# Altium PCB Fastino_Ground_Isolator.PcbDoc (part 4 of 4)
Units mm, origin at the board's own origin, x right, y up, seen from the top; angles counter-clockwise.
Board outline 40 x 100 mm, 4 copper layers (Top Layer, Layer 1, Layer 2, Bottom Layer), stack 1.551 mm thick; 157 components, 67 nets, 468 pads, 321 vias.
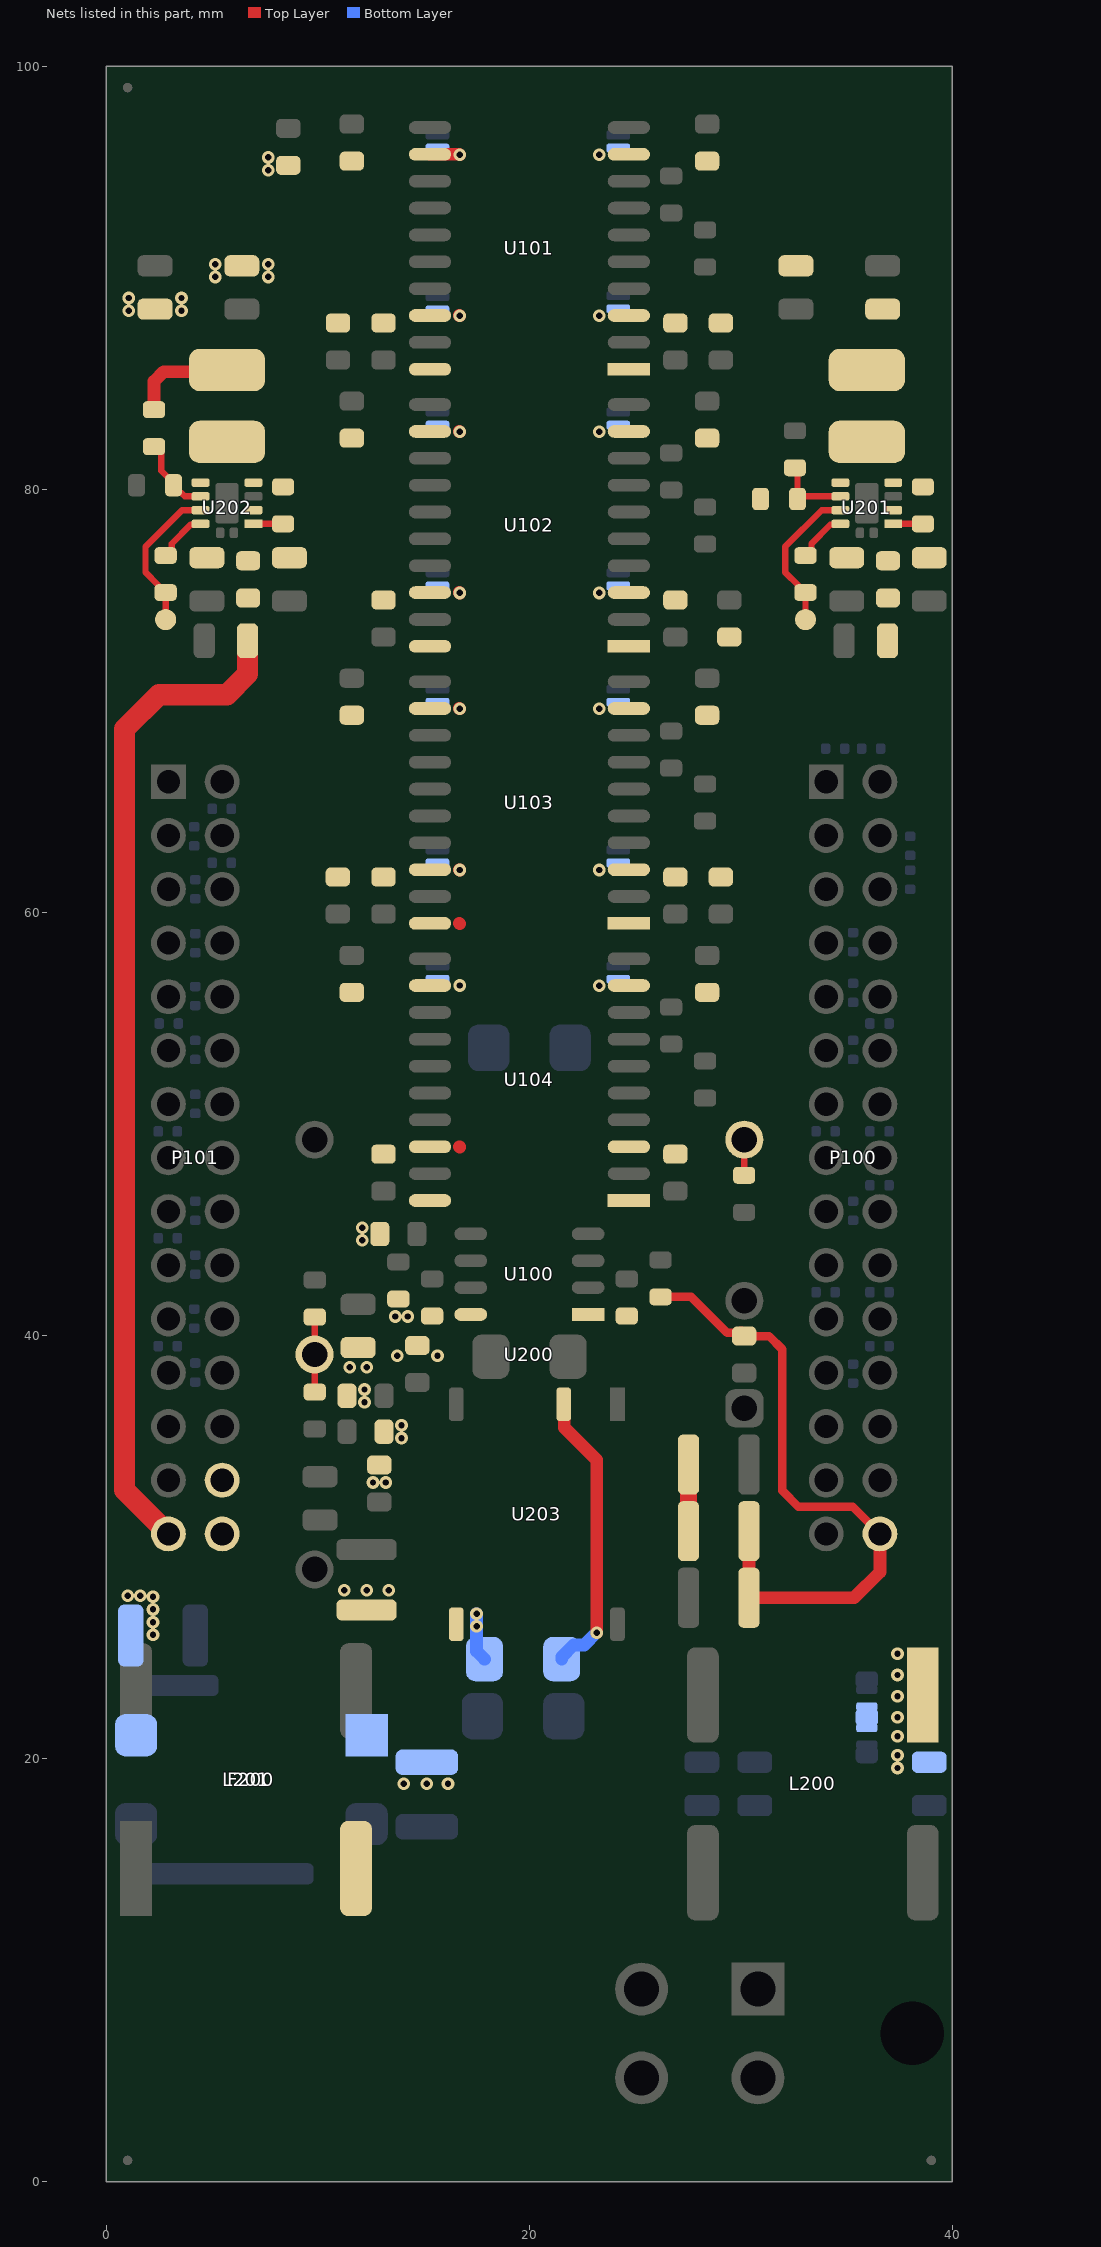
[diagram p5: the nets of this part, all layers, seen from the top]

## Via types
v1: diameter 0.6, hole 0.3, Top Layer to Bottom Layer, 321 vias

## Nets (pads, with @x,y where several pads share a name; then routed paths per layer and width w, separated by ;. In a path a pad name is that pad's centre, name@x,y a point inside that pad or via, vN(x,y) a via of type N, cw(c..) or ccw(c..) an arc to the next point about the centre after c; other vN are vias at no path point) (continued)
NetC208_1: C208.1 C209.1 L202.2 R203.1 U201.2
NetC224_1: C224.1 C225.1 L204.2 R207.1 U202.2
NetC240_1: C240.1 C242.1 L206.2 U203.2 | length 16.8
  Top Layer w0.6: U203.2@21.62,36.75 21.645,36.725 21.645,35.655 23.175,34.125 v1(23.175,25.95)
  Top Layer w0.8: L206.2@27.52,30.75 27.52,33.895 C242.1@27.525,33.9
  Bottom Layer w0.6: C240.1@21.525,24.7 21.525,24.801 22.09,25.365 22.59,25.365 v1(23.175,25.95)
NetL203_1: L203.1 U201.4 U201.5
NetL205_1: L205.1 U202.4 U202.5
NetR200_2: R200.2 R202.2 U200.5 | length 3.6
  Top Layer w0.3: R200.2@9.85,37.325 9.85,39.09 U200.5@9.84,39.1 9.85,39.11 R202.2@9.85,40.875
NetR201_2: R201.2 U200.3 | length 1.7
  Top Layer w0.3: R201.2@30.15,47.575 30.15,49.25 U200.3@30.16,49.26
NetR203_2: R203.2 U201.1 | length 1.4
  Top Layer w0.3: U201.1@37.2,78.375 R203.2@38.6,78.375
NetR204_2: R204.2 R205.1 U201.6 | length 3.6
  Top Layer w0.3: R205.1@32.55,81.025 32.675,80.9 R204.2@32.675,79.55 32.8,79.675 U201.6@34.7,79.675
NetR206_1: R206.1 U201.8 | length 2.5
  Top Layer w0.3: R206.1@33.05,76.875 33.087,76.875 33.333,77.121 33.333,77.436 34.223,78.325 34.65,78.325 U201.8@34.7,78.375
NetR206_2: R206.2 TP200.1 U201.7 | length 7.2
  Top Layer w0.3: TP200.1@33.05,73.85 R206.2@33.05,75.125 32.952,75.125 32.706,75.371 32.706,75.469 32.1,76.075 32.1,77.302 33.823,79.025 U201.7@34.7,79.025
NetR207_2: R207.2 U202.1 | length 1.4
  Top Layer w0.3: U202.1@6.95,78.375 R207.2@8.35,78.375
NetR208_2: R208.2 R209.1 U202.6 | length 3.8
  Top Layer w0.3: R208.2@2.25,82.025 2.348,82.025 2.594,81.779 2.594,80.888 3.175,80.307 3.175,80.102 3.421,79.856 3.519,79.856 3.7,79.675 U202.6@4.45,79.675
NetR210_1: R210.1 U202.8 | length 2.5
  Top Layer w0.3: R210.1@2.8,76.875 2.837,76.875 3.083,77.121 3.083,77.436 3.973,78.325 4.4,78.325 U202.8@4.45,78.375
NetR210_2: R210.2 TP201.1 U202.7 | length 7.1
  Top Layer w0.3: R210.2@2.702,75.125 2.456,75.371 2.456,75.469 1.85,76.075 1.85,77.302 3.573,79.025 U202.7@4.45,79.025 ; TP201.1@2.8,73.85 R210.2@2.8,75.125
P2V5: C210.1 C211.1 C212.1 C213.1 C214.1 C215.1 C216.1 C217.1 C218.1 C219.1 C220.1 C221.1 C222.1 C252.1 C253.1 C254.1 C255.1 C260.1 C261.1 C262.1 L203.2 R204.1 U101.1 U101.3 U101.9 U102.1 U102.3 U102.9 U103.1 U103.3 U103.9 U104.1 U104.3 U104.9
  other v1: 23.3,56.53 23.3,62.01 23.3,69.63 23.3,75.11 23.3,82.73 23.3,88.21 23.3,95.83
P2V5_R: C226.1 C227.1 C228.1 C229.1 C230.1 C231.1 C232.1 C233.1 C234.1 C235.1 C236.1 C237.1 C238.1 C256.1 C257.1 C258.1 C259.1 C264.1 C265.1 C266.1 L205.2 R208.1 U101.12 U101.18 U101.20 U102.12 U102.18 U102.20 U103.12 U103.18 U103.20 U104.12 U104.18 U104.20 | length 6.6
  Top Layer w0.6: R208.1@2.25,83.775 2.25,85.113 2.702,85.565 5.615,85.565 L205.2@5.7,85.65 ; U101.12@15.3,95.845 16,95.845 16.685,95.845 v1(16.7,95.83) ; 16.685,48.925 16.7,48.91 ; 16.685,59.485 16.7,59.47 ; v1@16.685,62.025 v1(16.7,62.01) ; v1@16.685,69.645 v1(16.7,69.63) ; v1@16.685,75.125 v1(16.7,75.11) ; v1@16.685,82.745 v1(16.7,82.73) ; v1@16.685,88.225 v1(16.7,88.21)
  other v1: 16.7,56.55 1.05,88.45 3.55,88.45 1.05,89.05 3.55,89.05 5.15,90.05 7.65,90.05 5.15,90.65 7.65,90.65 7.65,95.1 7.65,95.7
P3V3_MP: C241.1 C251.1 L206.1 P100.30 R102.2 R103.2 U100.1 | length 30.6
  Top Layer w0.4: R102.2@26.2,41.825 27.649,41.825 29.349,40.125 C251.1@30,40.125 ; C251.1@30.15,39.975 31.325,39.975 31.95,39.35 31.95,32.666 32.716,31.9 35.29,31.9 P100.30@36.57,30.62
  Top Layer w0.6: C251.1@30,40.125 C251.1@30.15,39.975 ; L206.1@30.38,30.75 30.377,30.748 30.377,27.603 C241.1@30.375,27.6 35.35,27.6 36.57,28.82 P100.30@36.57,30.62
P3V3_MP_R: C240.2 C243.1 C244.1 C245.1 C246.1 C247.1 C248.1 C249.1 P101.30 R104.2 R105.2 U100.8 U203.5 | length 2.3
  Bottom Layer w0.6: v1(17.5,26.85) 17.5,25.075 C240.2@17.875,24.7
  other v1: 17.5,26.25 11.25,27.95 12.3,27.95 13.35,27.95 12.6,33.05 13.2,33.05 13.95,35.15 13.95,35.75 12.2,36.85 12.2,37.45 11.5,38.5 12.3,38.5 13.75,39.05 15.65,39.05 13.65,40.9 14.25,40.9 12.1,44.5 12.1,45.1
P12V0: A102.2 A103.2 C201.1 C223.1 L200.1 L202.1 R100.2 R101.2
  other v1: 37.4,19.55 37.4,20.15 37.4,21.05 37.4,21.95 37.4,22.95 37.4,23.95 37.4,24.95
P12V0_ISO: C206.1 C239.1 F200.2 L204.1 P101.28 P101.29 | length 47.4
  Top Layer w1: P101.29@2.93,30.62 0.851,32.699 0.851,68.668 2.476,70.294 5.7,70.294 6.675,71.269 C239.1@6.675,72.85
  other v1: 2.2,25.85 2.2,26.45 2.2,27.05 2.2,27.65 1,27.7 1.6,27.7
P12V0_ISO_BF: C205.1 F200.1 L201.2
  other v1: 14.05,18.8 15.15,18.8 16.15,18.8
pads on no net: Fid200.1 Fid201.1 Fid202.1 Fid203.1 Fid204.1 Fid205.1 P102.5 U201.9 U201.10 U202.9 U202.10 U203.8
copper on no net: | length 59.4
  Top Layer w0.15: 1.9,9.8 14.4,9.8 ; 3.55,6.95 12.6,6.95 ; 10.5,4.15 10.5,4.1 5.65,4.1 5.65,4.15 10.55,4.15
  Layer 1 w0.15: 36.9,98.7 36.9,99.9 ; 37.9,98.7 37.9,99.9 ; 38.9,98.7 38.9,99.9 ; 35.9,98.7 35.9,99.9 39.9,99.9 39.9,98.7 35.9,98.7
  Layer 2 w0.15: 36.9,98.7 36.9,99.9 ; 37.9,98.7 37.9,99.9 ; 38.9,98.7 38.9,99.9 ; 35.9,98.7 39.9,98.7 39.9,99.9 35.9,99.9 35.9,98.7

## Polygon pours and split planes (outlines as drawn)
P2V5_R on Top Layer "NONET_L-01_P-001" (solid, remove dead copper, pour order 7): 0,98 0,85.65 1,84.65 7.1,84.65 8.25,83.5 8.25,51.25 9,50.5 10.25,50.5 11,49.75 11,46.25 11.75,45.5 17,45.5 18,46.5 18,98
P2V5 on Top Layer "NONET_L-01_P-001" (solid, remove dead copper, pour order 1): 40,98 40,85.65 39,84.65 32.9,84.65 31.75,83.5 31.75,45.75 30,45.75 22,45.75 22,98
P12V0_ISO_BF on Top Layer "NONET_L-01_P-001" (solid, remove dead copper, pour order 18): 11.05,19 11.55,19.5 16.25,19.5 17,18.75 17,13.05 16.5,12.55 11.5,12.55 11.05,13
P12V0 on Top Layer "NONET_L-01_P-001" (solid, remove dead copper, pour order 2): 36.45,73.45 36.45,71.55 39,69 39,27 37.1,25.1 37.1,20.758 39.35,20.758 39.35,25.85 39.75,26.25 39.75,26.75 39.75,69.4 37.4,71.75 37.4,73.45
GND on Layer 1 "NONET_L-01_P-001" (solid, remove dead copper, pour order 23): 21.5,100 21.5,28.75 24.5,25.75 34.5,25.75 35.25,25 35.25,14.75 32,11.5 23.5,11.5 23,11 23,0.75 23.75,0 31.5,0 40,0 40,100
GND_ISO on Layer 1 "Layer 1-GND_ISO" (solid, remove dead copper, pour order 19): 0,100 0,68 0,25.5 8,25.5 8.75,26.25 18,26.25 18.5,26.75 18.5,32.75 18.5,100
GND_ISO_BF on Layer 1 "Layer 1-GND_ISO_BF" (solid, remove dead copper, pour order 31): 18.5,0.75 18.5,22.5 15.5,25.5 11.25,25.5 10.75,25 10.75,12 10.25,11.5 0.75,11.5 0,10.75 0,1 1,0 17.75,0
GND on Layer 2 "NONET_L-01_P-001" (solid, remove dead copper, pour order 29): 23,0 23,11 23.5,11.5 32,11.5 35.2,14.7 35.2,28.2 33.2,30.2 33.2,42.8 32,44 28,44 26.7,42.7 26.7,26.4 25.8,25.5 22.6,25.5 21.5,26.6 21.5,100 40,100 40,0
GND_ISO on Layer 2 "NONET_L-01_P-001" (solid, remove dead copper, pour order 30): 0,100 0,34.9 7.9,34.9 8.5,35.5 8.5,45 9.5,46 12.3,46 12.7,45.6 13,45.6 13.5,45.1 13.5,44.4 13.7,44.2 18.5,44.2 18.5,100
GND_ISO_BF on Layer 2 "Layer 1-GND_ISO_BF" (solid, remove dead copper, pour order 26): 18.5,0.75 18.5,22.5 15.5,25.5 11.25,25.5 10.75,25 10.75,12 10.25,11.5 0.75,11.5 0,10.75 0,1 1,0 17.75,0
NetC200_1 on Layer 2 "NONET_L-01_P-001" (solid, remove dead copper, pour order 27): 29,19 30.2,19 30.2,31.2 31,32 31,37.1 30.7,37.4 29.6,37.4 29.3,37.1 29.3,36.1 30,35.4 30,32.3 29.2,31.5 29.2,25.7 29,25.5
NetC202_2 on Layer 2 "NONET_L-01_P-001" (solid, remove dead copper, pour order 28): 31.5,43.5 32.5,42.5 32.5,13 31.5,12 28.5,12 27.5,13 27.5,42.5 28.5,43.5
P3V3_MP_R on Layer 2 "NONET_L-01_P-001" (solid, remove dead copper, pour order 21): 4.75,30.75 5.45,31.45 9.45,31.45 11.25,33.25 11.25,44.75 12,45.5 12.5,45.5 13,45 13,44 13.5,43.5 16,43.5 17.25,42.25 17.25,28.25 18,27.5 18,26.25 17.5,25.75 15,25.75 14.25,26.5 6.75,26.5 6.25,27 6.25,28.25 4.75,29.75
P12V0_ISO on Layer 2 "NONET_L-01_P-001" (solid, remove dead copper, pour order 15): 0,33.75 0,25 0.5,24.5 4.75,24.5 5.5,25.25 5.5,28.5 4.35,29.65 4.35,30.65 4.35,31.1 5,31.75 5.5,31.75 6.5,31.75 7,32.25 7,34.25 0.5,34.25
NetA102_1 on Bottom Layer "NONET_L-01_P-001" (solid, remove dead copper, pour order 24): 35.45,20.75 35.45,14.95 32,11.5 23.5,11.5 23,11 23,0 40,0 40,9 36.45,12.55 36.45,20.75

## Keep-outs
Top Layer:
  region: 0,0 0,2 40,2 40,0
  region: 0,100 0,98 40,98 40,100

## Other copper
Top Layer:
  region net P3V3_MP_R: 16.35,27.15 17.5,27.15 17.8,26.85 17.8,26.1 17.25,25.55 16.35,25.55
  region: 10.279,5.227 10.244,5.231 10.231,5.236 10.21,5.244 10.201,5.249 10.177,5.268 10.158,5.292 10.151,5.298 10.147,5.307 10.121,5.346 10.117,5.355 10.104,5.368 10.099,5.376 10.093,5.383 10.084,5.387 10.076,5.396 10.045,5.413 10.024,5.422 9.993,5.435 9.954,5.456 9.931,5.476 9.916,5.487 9.903,5.5 9.894,5.504 9.883,5.519 9.87,5.528 9.866,5.536 9.849,5.554 9.844,5.562 9.831,5.593 9.827,5.61 9.818,5.631 9.814,5.662 9.805,5.67 9.801,5.692 9.792,5.701 9.788,5.709 9.782,5.716 9.773,5.72 9.723,5.77 9.684,5.852 9.678,5.876 9.673,5.897 9.66,5.932 9.652,5.954 9.637,5.99 9.641,6.055 9.658,6.086 9.68,6.124 9.689,6.133 9.691,6.14 9.699,6.144 9.708,6.153 9.725,6.157 9.753,6.146 9.799,6.122 9.82,6.114 9.829,6.105 9.885,6.075 9.894,6.066 9.903,6.062 9.911,6.053 9.92,6.049 9.929,6.04 9.95,6.027 9.963,6.014 9.98,6.01 10.002,6.014 10.013,6.025 10.073,6.15 10.082,6.172 10.099,6.228 10.112,6.276 10.125,6.31 10.143,6.341 10.153,6.351 10.218,6.347 10.242,6.328 10.264,6.306 10.307,6.215 10.311,6.207 10.339,6.166 10.352,6.153 10.361,6.148 10.417,6.122 10.435,6.118 10.601,6.12 10.638,6.114 10.677,6.092 10.683,6.068 10.687,6.051 10.683,6.003 10.679,5.99 10.657,5.934 10.651,5.91 10.644,5.852 10.64,5.835 10.644,5.804 10.64,5.787 10.642,5.716 10.64,5.696 10.644,5.683 10.649,5.627 10.657,5.575 10.662,5.558 10.657,5.51 10.644,5.48 10.618,5.433 10.601,5.407 10.595,5.383 10.579,5.346 10.573,5.322 10.54,5.264 10.525,5.244 10.517,5.24 10.469,5.218 10.4,5.214 10.29,5.225 10.283,5.227
  region: 1331 vertices and 4 holes, not listed, extent 1.58,2.213 14.835,10.148
  region: 162 vertices and 0 holes, not listed, extent 5.52,5.292 6.679,6.46
  region net P2V5_R: 7.65,89.75 5.15,89.75 4.85,90.05 4.85,90.8 5.1,91.05 7.7,91.05 7.95,90.8 7.95,90.05
  region net GND_ISO: 7.65,89.35 5.15,89.35 4.85,89.05 4.85,88.3 5.1,88.05 7.7,88.05 7.95,88.3 7.95,89.05
  region net P2V5_R: 1.05,89.35 3.55,89.35 3.85,89.05 3.85,88.3 3.6,88.05 1,88.05 0.75,88.3 0.75,89.05
  region net GND_ISO: 1.05,89.75 3.55,89.75 3.85,90.05 3.85,90.8 3.6,91.05 1,91.05 0.75,90.8 0.75,90.05
  region net GND: 29.5,57.2 29.65,57.35 29.65,57.8 29.05,58.4 27.75,58.4 27.15,57.8 27.15,57.35 27.3,57.2
  region net P3V3_MP_R: 12.5,36.85 12.5,37.45 12.2,37.75 11.8,37.75 11.75,37.7 11.1,37.7 11.1,36.6 11.75,36.6 11.8,36.55 12.2,36.55
  region net GND_ISO: 12.5,35.15 12.5,35.75 12.2,36.05 11.8,36.05 11.75,36 11.1,36 11.1,34.9 11.75,34.9 11.8,34.85 12.2,34.85
  region net P3V3_MP_R: 14.25,35.15 14.25,35.75 13.95,36.05 13.55,36.05 13.5,36 12.85,36 12.85,34.9 13.5,34.9 13.55,34.85 13.95,34.85
  region net P3V3_MP_R: 12.6,32.75 13.2,32.75 13.5,33.05 13.5,33.45 13.45,33.5 13.45,34.15 12.35,34.15 12.35,33.5 12.3,33.45 12.3,33.05
  region net GND_ISO: 12.6,31 13.2,31 13.5,31.3 13.5,31.7 13.45,31.75 13.45,32.4 12.35,32.4 12.35,31.75 12.3,31.7 12.3,31.3
  region net GND_ISO: 13.75,38.55 15.65,38.55 15.95,38.25 15.95,38.15 15.15,37.35 14.25,37.35 13.45,38.15 13.45,38.25
  region net P3V3_MP_R: 13.75,38.75 15.65,38.75 15.95,39.05 15.95,39.7 15.7,39.95 13.7,39.95 13.45,39.7 13.45,39.05
  region net P3V3_MP_R: 11.8,45.1 11.8,44.5 12.1,44.2 12.5,44.2 12.55,44.25 13.2,44.25 13.2,45.35 12.55,45.35 12.5,45.4 12.1,45.4
  region net GND_ISO: 13.55,45.1 13.55,44.5 13.85,44.2 14.25,44.2 14.3,44.25 14.95,44.25 14.95,45.35 14.3,45.35 14.25,45.4 13.85,45.4
  region net NetC240_1: 21.9,37.4 21.9,35.85 22.5,35.25 27.8,35.25 28,35.05 28,32.75 26.5,32.75 25,34.25 22.6,34.25 21.3,35.55 21.3,37.4
  region net P3V3_MP_R: 12.45,38.2 12.65,38.4 12.65,39.8 11.15,39.8 11.15,38.4 11.35,38.2
  region net GND_ISO: 12.45,40.25 12.65,40.45 12.65,41.85 11.15,41.85 11.15,40.45 11.35,40.25
  region net NetC200_2: 9.3,31.55 9.3,30.85 8.95,30.5 8.95,28.95 9.85,28.05 10.65,28.85 10.65,31.55
  region net GND_ISO: 15.45,37.25 15.75,37.55 16.7,37.55 16.85,37.4 16.85,36.05 16.75,35.95 15.7,35.95 15.45,36.2
  region net P3V3_MP_R: 13.35,28.25 13.65,27.95 13.65,26.7 10.95,26.7 10.95,27.95 11.25,28.25
  region net GND_ISO: 13.35,28.65 13.65,28.95 13.65,30.2 10.95,30.2 10.95,28.95 11.25,28.65
  region net GND_ISO_BF: 11.45,25.45 12.95,25.45 13.25,25.15 13.25,22.75 12.55,22.05 11.05,22.05 11.05,25.05
  region net GND_ISO: 10.4,59.65 10.4,60.25 10.85,60.7 12.25,60.7 12.6,60.35 13.5,60.35 13.65,60.2 13.65,58.9 13.5,58.75 11.3,58.75
  region net GND_ISO: 12.7,57.2 12.85,57.35 12.85,57.8 12.25,58.4 10.95,58.4 10.35,57.8 10.35,57.35 10.5,57.2
  region net GND_ISO: 12.7,70.3 12.85,70.45 12.85,70.9 12.25,71.5 10.95,71.5 10.35,70.9 10.35,70.45 10.5,70.3
  region net GND_ISO: 10.4,85.85 10.4,86.45 10.85,86.9 12.25,86.9 12.6,86.55 13.5,86.55 13.65,86.4 13.65,85.1 13.5,84.95 11.3,84.95
  region net GND_ISO: 12.7,83.4 12.85,83.55 12.85,84 12.25,84.6 10.95,84.6 10.35,84 10.35,83.55 10.5,83.4
  region net GND_ISO: 12.7,96.5 12.85,96.65 12.85,97.1 12.25,97.7 10.95,97.7 10.35,97.1 10.35,96.65 10.5,96.5
  region net GND: 29.5,39.3 30.3,39.3 30.7,38.9 30.7,38.45 30.7,37.95 30.55,37.8 29.75,37.8 29.6,37.95 29.6,38.45 29.2,38.85 29.2,39
  region net GND: 29.9,75.95 30.05,75.8 30.05,75.35 30,75.3 30,74.5 28.9,74.5 28.9,75.3 28.85,75.35 28.85,75.8 29,75.95
  region net GND: 33.85,89.35 31.35,89.35 31.05,89.05 31.05,88.3 31.3,88.05 33.9,88.05 34.15,88.3 34.15,89.05
  region net GND: 29.6,85.85 29.6,86.45 29.15,86.9 27.75,86.9 27.4,86.55 26.5,86.55 26.35,86.4 26.35,85.1 26.5,84.95 28.7,84.95
  region net GND: 29.5,70.3 29.65,70.45 29.65,70.9 29.05,71.5 27.75,71.5 27.15,70.9 27.15,70.45 27.3,70.3
  region net GND: 29.5,83.4 29.65,83.55 29.65,84 29.05,84.6 27.75,84.6 27.15,84 27.15,83.55 27.3,83.4
  region net GND: 29.5,96.5 29.65,96.65 29.65,97.1 29.05,97.7 27.75,97.7 27.15,97.1 27.15,96.65 27.3,96.5
  region net GND_ISO: 7.35,97.45 7.35,96.55 7.5,96.4 7.8,96.4 8.05,96.65 9,96.65 9.15,96.8 9.15,97.35 9,97.5 8.05,97.5 7.95,97.6 7.5,97.6
  region net P2V5_R: 7.35,94.95 7.35,95.85 7.5,96 7.8,96 8.05,95.75 9,95.75 9.15,95.6 9.15,95.05 9,94.9 8.05,94.9 7.95,94.8 7.5,94.8
  region net NetL205_1: 4.05,80.25 4.15,80.15 4.75,80.15 5.1,80.5 6.2,80.5 6.55,80.15 7.25,80.15 7.35,80.25 7.35,80.7 7.5,80.85 7.5,82.8 7.05,83.25 4.3,83.25 3.9,82.85 3.9,80.85 4.05,80.7
  region net NetC224_1: 4.1,76.3 9.1,76.3 9.45,76.65 9.45,80.3 9.25,80.5 8,80.5 7.85,80.35 7.85,79.9 7.85,79.7 7.35,79.2 6.6,79.2 6.6,78.85 7.7,78.85 8,79.15 8.85,79.15 8.85,79.75 8.85,79.15 9.15,78.85 9.15,77.95 8.45,77.25 4.1,77.25 3.95,77.1 3.95,76.45
  region net GND_ISO: 5.3,75.95 5.55,75.7 5.55,74.45 5.35,74.25 4.15,74.25 3.95,74.45 3.95,75.7 4.2,75.95
  region net GND_ISO: 8,75.9 8.7,75.2 9.25,75.2 9.45,75 9.45,74.45 9.25,74.25 8.7,74.25 8,73.55 7.65,73.55 7.5,73.7 7.5,75.75 7.65,75.9
  region net GND_ISO: 5.85,72.1 5.7,71.95 5.35,71.95 5.25,72.05 4.3,72.05 4.15,72.2 4.15,73.5 4.3,73.65 5.25,73.65 5.35,73.75 5.7,73.75 5.85,73.6
  region net P12V0_ISO: 6.2,72.2 6.2,75.25 7.15,75.25 7.15,72.2
  region net P12V0: 36.45,72.2 36.45,75.25 37.4,75.25 37.4,72.2
  region net GND: 36.1,72.1 35.95,71.95 35.6,71.95 35.5,72.05 34.55,72.05 34.4,72.2 34.4,73.5 34.55,73.65 35.5,73.65 35.6,73.75 35.95,73.75 36.1,73.6
  region net GND: 38.25,75.9 38.95,75.2 39.5,75.2 39.7,75 39.7,74.45 39.5,74.25 38.95,74.25 38.25,73.55 37.9,73.55 37.75,73.7 37.75,75.75 37.9,75.9
  region net GND: 35.55,75.95 35.8,75.7 35.8,74.45 35.6,74.25 34.4,74.25 34.2,74.45 34.2,75.7 34.45,75.95
  region net NetC208_1: 34.35,76.3 39.35,76.3 39.7,76.65 39.7,80.3 39.5,80.5 38.25,80.5 38.1,80.35 38.1,79.9 38.1,79.7 37.6,79.2 36.85,79.2 36.85,78.85 37.95,78.85 38.25,79.15 39.1,79.15 39.1,79.75 39.1,79.15 39.4,78.85 39.4,77.95 38.7,77.25 34.35,77.25 34.2,77.1 34.2,76.45
  region net NetL203_1: 34.3,80.25 34.4,80.15 35,80.15 35.35,80.5 36.45,80.5 36.8,80.15 37.5,80.15 37.6,80.25 37.6,80.7 37.75,80.85 37.75,82.8 37.3,83.25 34.55,83.25 34.15,82.85 34.15,80.85 34.3,80.7
  region net GND: 37.95,89.75 35.45,89.75 35.15,90.05 35.15,90.8 35.4,91.05 38,91.05 38.25,90.8 38.25,90.05
  region net GND_ISO: 12.6,71.85 11.8,72.65 11.8,73.5 12.1,73.8 12.25,73.8 12.6,73.45 13.5,73.45 13.65,73.3 13.65,72 13.5,71.85
  region net GND_ISO: 12.6,45.65 11.8,46.45 11.8,47.3 12.1,47.6 12.25,47.6 12.6,47.25 13.5,47.25 13.65,47.1 13.65,45.8 13.5,45.65
  region net GND: 27.4,71.85 28.2,72.65 28.2,73.5 27.9,73.8 27.75,73.8 27.4,73.45 26.5,73.45 26.35,73.3 26.35,72 26.5,71.85
  region net GND: 29.6,59.65 29.6,60.25 29.15,60.7 27.75,60.7 27.4,60.35 26.5,60.35 26.35,60.2 26.35,58.9 26.5,58.75 28.7,58.75
  region net GND: 27.4,45.65 28.2,46.45 28.2,47.3 27.9,47.6 27.75,47.6 27.4,47.25 26.5,47.25 26.35,47.1 26.35,45.8 26.5,45.65
  region net P3V3_MP: 26.55,42.2 25.8,42.2 25.7,42.1 25.7,41.7 25.3,41.3 24.25,41.3 24.1,41.15 24.1,40.7 24.25,40.55 26.45,40.55 26.7,40.8 26.7,42.05
  region net P3V3_MP: 24.95,40.55 23.45,40.55 23.3,40.7 22.25,40.7 22.25,41.3 24.95,41.3
  region net P3V3_MP_R: 15.05,40.55 16.55,40.55 16.7,40.7 17.75,40.7 17.75,41.3 15.05,41.3
  region net P3V3_MP_R: 13.45,42.2 14.2,42.2 14.3,42.1 14.3,41.7 14.7,41.3 15.75,41.3 15.9,41.15 15.9,40.7 15.75,40.55 13.55,40.55 13.3,40.8 13.3,42.05
  region net GND: 21.35,37.95 22,37.95 23.85,36.1 23.85,35.7 24.45,35.7 25.2,36.45 25.2,37.65 22.8,40.05 21.35,40.05 21,39.7 21,38.3
  region net GND: 24.35,38.5 25.2,37.65 25.2,36.35 24.35,35.5 24,35.5 23.85,35.65 23.85,38.35 24,38.5
  region net GND: 28.75,26.55 28.75,28.65 28.45,28.95 26.9,28.95 26.9,26.25 28.45,26.25
  region net GND: 29.15,34.95 29.15,32.85 29.45,32.55 31,32.55 31,35.25 29.45,35.25
  region net NetC202_2: 27.65,18.4 29.5,18.4 29.7,18.2 29.7,12.5 29.55,12.35 27.9,12.35 27.45,12.8 27.45,18.2
  region net NetC200_1: 27.65,19.2 29.5,19.2 29.7,19.4 29.7,25.1 29.55,25.25 27.9,25.25 27.45,24.8 27.45,19.4
  region net P12V0: 39.15,19.2 37.3,19.2 37.1,19.4 37.1,25.1 37.25,25.25 38.9,25.25 39.35,24.8 39.35,19.4
  region net GND: 39.15,18.4 37.3,18.4 37.1,18.2 37.1,12.5 37.25,12.35 38.9,12.35 39.35,12.8 39.35,18.2
  text "Fastino Ground" at 6.687,98.5 h0.8
  text "Isolator-rev.'.PCB_Revision'" at 22.237,98.5 h0.8
  text "+" at 25.8,10.817 h1 r90
  text "-" at 31.3,10.817 h1 r90
  text "+12V0" at 23.45,4.951 h1 r90
  text "+" at 25.8,3.183 h1 r90
  text "-" at 31.3,3.183 h1 r90
  text "TIQI" at 1.667,2.8 h1
Layer 1:
  rectangle: 37.9,98.7 38.9,99.9
Layer 2:
  rectangle: 36.9,98.7 37.9,99.9
Bottom Layer:
  region net P2V5: 24.75,57.05 23.25,57.05 23,56.8 23,56.35 23.15,56.2 24.55,56.2 24.9,56.55 24.9,56.9
  region net GND: 24.75,57.25 23.25,57.25 23,57.5 23,57.95 23.15,58.1 24.55,58.1 24.9,57.75 24.9,57.4
  region net P2V5: 24.75,62.55 23.25,62.55 23,62.3 23,61.85 23.15,61.7 24.55,61.7 24.9,62.05 24.9,62.4
  region net GND: 24.75,62.75 23.25,62.75 23,63 23,63.45 23.15,63.6 24.55,63.6 24.9,63.25 24.9,62.9
  region net P2V5: 24.75,70.15 23.25,70.15 23,69.9 23,69.45 23.15,69.3 24.55,69.3 24.9,69.65 24.9,70
  region net GND: 24.75,70.35 23.25,70.35 23,70.6 23,71.05 23.15,71.2 24.55,71.2 24.9,70.85 24.9,70.5
  region net P2V5: 24.75,75.65 23.25,75.65 23,75.4 23,74.95 23.15,74.8 24.55,74.8 24.9,75.15 24.9,75.5
  region net GND: 24.75,75.85 23.25,75.85 23,76.1 23,76.55 23.15,76.7 24.55,76.7 24.9,76.35 24.9,76
  region net P2V5: 24.75,83.25 23.25,83.25 23,83 23,82.55 23.15,82.4 24.55,82.4 24.9,82.75 24.9,83.1
  region net GND: 24.75,83.45 23.25,83.45 23,83.7 23,84.15 23.15,84.3 24.55,84.3 24.9,83.95 24.9,83.6
  region net P2V5: 24.75,88.73 23.25,88.73 23,88.48 23,88.03 23.15,87.88 24.55,87.88 24.9,88.23 24.9,88.58
  region net GND: 24.75,88.93 23.25,88.93 23,89.18 23,89.63 23.15,89.78 24.55,89.78 24.9,89.43 24.9,89.08
  region net GND: 24.75,96.55 23.25,96.55 23,96.8 23,97.25 23.15,97.4 24.55,97.4 24.9,97.05 24.9,96.7
  region net P2V5: 24.75,96.35 23.25,96.35 23,96.1 23,95.65 23.15,95.5 24.55,95.5 24.9,95.85 24.9,96.2
  region net P2V5_R: 15.25,57.05 16.75,57.05 17,56.8 17,56.35 16.85,56.2 15.45,56.2 15.1,56.55 15.1,56.9
  region net GND_ISO: 15.25,57.25 16.75,57.25 17,57.5 17,57.95 16.85,58.1 15.45,58.1 15.1,57.75 15.1,57.4
  region net GND_ISO: 15.25,62.73 16.75,62.73 17,62.98 17,63.43 16.85,63.58 15.45,63.58 15.1,63.23 15.1,62.88
  region net P2V5_R: 15.25,62.53 16.75,62.53 17,62.28 17,61.83 16.85,61.68 15.45,61.68 15.1,62.03 15.1,62.38
  region net GND_ISO: 15.25,70.35 16.75,70.35 17,70.6 17,71.05 16.85,71.2 15.45,71.2 15.1,70.85 15.1,70.5
  region net P2V5_R: 15.25,70.15 16.75,70.15 17,69.9 17,69.45 16.85,69.3 15.45,69.3 15.1,69.65 15.1,70
  region net GND_ISO: 15.25,75.85 16.75,75.85 17,76.1 17,76.55 16.85,76.7 15.45,76.7 15.1,76.35 15.1,76
  region net P2V5_R: 15.25,75.65 16.75,75.65 17,75.4 17,74.95 16.85,74.8 15.45,74.8 15.1,75.15 15.1,75.5
  region net GND_ISO: 15.25,83.45 16.75,83.45 17,83.7 17,84.15 16.85,84.3 15.45,84.3 15.1,83.95 15.1,83.6
  region net P2V5_R: 15.25,83.25 16.75,83.25 17,83 17,82.55 16.85,82.4 15.45,82.4 15.1,82.75 15.1,83.1
  region net GND_ISO: 15.25,88.93 16.75,88.93 17,89.18 17,89.63 16.85,89.78 15.45,89.78 15.1,89.43 15.1,89.08
  region net P2V5_R: 15.25,88.73 16.75,88.73 17,88.48 17,88.03 16.85,87.88 15.45,87.88 15.1,88.23 15.1,88.58
  region net P2V5_R: 15.25,96.35 16.75,96.35 17,96.1 17,95.65 16.85,95.5 15.45,95.5 15.1,95.85 15.1,96.2
  region net GND_ISO: 15.25,96.55 16.75,96.55 17,96.8 17,97.25 16.85,97.4 15.45,97.4 15.1,97.05 15.1,96.7
  region: 4.978,93.059 4.978,93.074 4.993,93.074 4.993,93.059
  region: 4.844,96.511 4.844,96.541 4.874,96.541 4.874,96.511 4.859,96.511
  region: 4.237,97.933 4.207,97.933 4.207,97.963 4.222,97.963 4.222,97.948 4.237,97.948
  region: 4.519,98.111 4.519,98.096 4.504,98.096 4.504,98.126 4.519,98.126
  region: 4.519,98.096 4.533,98.096 4.533,98.067 4.519,98.067 4.519,98.081
  region: 4.652,97.963 4.652,97.948 4.637,97.948 4.637,97.963
  region: 4.815,96.556 4.815,96.541 4.8,96.541 4.8,96.556
  region: 3.393,93.119 3.378,93.119 3.378,93.133 3.393,93.133 3.393,93.148 3.407,93.148 3.407,93.133 3.422,93.133 3.422,93.104 3.437,93.104 3.437,93.074 3.452,93.074 3.452,93.044 3.481,93.044 3.481,93 3.467,93 3.467,93.015 3.452,93.015 3.452,93.03 3.437,93.03 3.437,93.059 3.422,93.059 3.422,93.074 3.407,93.074 3.407,93.089 3.393,93.089 3.393,93.104
  region: 4.341,97.978 4.341,97.993 4.356,97.993 4.356,97.978 4.37,97.978 4.37,97.948 4.356,97.948 4.356,97.963 4.341,97.963
  region: 3.511,93.119 3.511,93.104 3.496,93.104 3.496,93.119
  region: 3.162,92.489 3.164,92.488 3.159,92.486 3.157,92.488 3.159,92.489
  region: 3.13,92.531 3.138,92.53 3.136,92.518 3.128,92.52 3.128,92.53
  region: 3.188,92.525 3.19,92.51 3.185,92.505 3.178,92.509 3.177,92.523 3.181,92.528 3.186,92.526
  region: 4.392,97.595 4.395,97.572 4.39,97.567 4.384,97.571 4.372,97.598 4.374,97.616 4.384,97.613 4.392,97.605 4.392,97.598
  region: 4.985,97.426 4.983,97.415 4.982,97.426 4.983,97.428
  region: 4.616,96.098 4.604,96.083 4.591,96.08 4.586,96.085 4.58,96.107 4.583,96.12 4.598,96.125 4.612,96.117 4.616,96.104 4.616,96.101
  region: 4.732,92.478 4.737,92.489 4.742,92.484 4.739,92.455 4.734,92.45 4.729,92.465 4.731,92.476
  region: 3.065,92.509 3.057,92.517 3.053,92.53 3.057,92.546 3.062,92.551 3.081,92.547 3.086,92.543 3.094,92.522 3.102,92.513 3.105,92.507 3.134,92.452 3.139,92.447 3.146,92.444 3.154,92.436 3.157,92.429 3.164,92.413 3.162,92.398 3.144,92.4 3.141,92.41 3.122,92.429 3.118,92.436 3.112,92.442 3.109,92.449 3.092,92.471 3.091,92.476 3.084,92.479 3.076,92.488 3.066,92.507
  region net GND_ISO_BF: 16.25,16.2 13.8,16.2 13.5,15.9 11.75,15.9 11.75,17.9 13,17.9 13.2,18.1 16.25,18.1
  region net P12V0_ISO_BF: 11.5,20.1 13.3,20.1 13.7,19.7 13.7,19.3 16.5,19.3 16.55,19.35 16.55,20.55 15,22.1 11.5,22.1
  region net GND_ISO: 0.4,17.45 0.4,14.45 0.8,14.05 9.5,14.05 9.8,14.35 9.8,14.75 5.3,19.25 5.3,23.75 1.9,23.75 1.9,23.2 2.75,22.35 2.75,18.5 2.15,17.9 0.85,17.9
  region net GND_ISO: 1.95,23.2 2.2,22.95 5,22.95 5.3,23.25 5.3,23.75 4.8,24.25 4.8,27.7 4.5,28 3.05,28 2.85,27.8 2.85,25.4 2.85,24.5 2.3,23.95 2.15,23.95 1.95,23.75
  region net P12V0_ISO: 0.45,20.4 2.35,20.4 2.35,22.25 1.75,22.85 1.75,24 2.5,24.75 2.5,27.8 2.3,28 0.85,28 0.55,27.7 0.55,24.6 0.45,24.5
  region net NetC200_1: 31.1,37.15 31.1,20.7 31.45,20.35 31.45,19.55 31.25,19.35 30,19.35 29.95,19.4 29.75,19.4 29.6,19.25 29.1,19.25 29,19.35 24.3,19.35 22.75,20.9 21.25,20.9 20.7,21.45 20.7,22.65 21.1,23.05 26.8,23.05 30,26.25 30,35.15 29.25,35.9 29.25,37.2 29.5,37.45 30.8,37.45
  region net NetC202_2: 30.5,42.55 31.5,41.55 31.5,40 32.5,39 32.5,26.5 33.75,25.25 33.75,14.5 31.5,12.25 28.5,12.25 26.75,14 26.75,18 27.25,18.5 31.25,18.5 31.75,19 31.75,20.5 31.5,20.75 31.5,38.5 29.25,40.75 29.25,42 29.8,42.55
  region net GND_ISO_BF: 16.3,18.1 13.9,18.1 13.7,17.9 13.7,16.4 16.6,16.4 16.6,17.8
  region net P12V0_ISO_BF: 16.3,18.5 13.9,18.5 13.7,18.7 13.7,20.2 16.6,20.2 16.6,18.8
  region net NetA103_1: 33.2,27.4 35.45,25.15 35.45,23.15 36.45,23.15 36.45,25.15 36.45,28.25 34.85,29.85 34.85,31 34.4,31.45 33.65,31.45 33.2,31
  region net P12V0: 35.45,21.25 36.7,21.25 37.2,20.75 37.55,20.75 37.75,20.95 37.75,23.05 37.55,23.25 37.2,23.25 36.6,22.65 35.45,22.65
  region net NetC200_1: 27.65,20.3 29,20.3 29.15,20.45 29.6,20.45 29.75,20.3 31.3,20.3 31.3,19.4 29.75,19.4 29.6,19.25 29.1,19.25 29,19.35 27.65,19.35
  region net NetC202_2: 27.65,18.25 29,18.25 29.15,18.4 29.6,18.4 29.75,18.25 31.3,18.25 31.3,17.35 29.75,17.35 29.6,17.2 29.1,17.2 29,17.3 27.65,17.3
  region net P12V0: 39.15,20.3 37.8,20.3 37.65,20.45 37.2,20.45 37.05,20.3 37.05,19.4 37.2,19.25 37.7,19.25 37.8,19.35 39.15,19.35
  region net GND: 39.15,18.25 37.8,18.25 37.65,18.4 37.2,18.4 37.05,18.25 37.05,17.35 37.2,17.2 37.7,17.2 37.8,17.3 39.15,17.3

## Silkscreen, mask and mechanical layers (free items; w line width, h text height)
Top Solder:
  drawing of 8 lines, arcs and shapes, not listed
  text "Fastino Ground" at 6.637,98.45 h0.8
  text "Isolator-rev.'.PCB_Revision'" at 22.188,98.45 h0.8
  text "Output" at 2.118,93.367 h1
  text "Input" at 33.217,93.367 h1
  text "Fastino" at 1.534,91.6 h1
  text "Kasli-SoC" at 31.135,91.6 h1
  text "+" at 25.8,10.817 h1 r90
  text "-" at 31.3,10.817 h1 r90
  text "+12V0" at 23.45,4.951 h1 r90
  text "+" at 25.8,3.183 h1 r90
  text "-" at 31.3,3.183 h1 r90
  text "TIQI" at 1.667,2.8 h1
Board Shape:
  the board outline again, w0.1
Top Component Outline:
  text "TOP" at 0,-1.5 h0.8
Drill Drawing:
  lines w0.254: -48.291,110.144 -46.597,110.144 -46.597,111.837 -48.291,111.837 -48.291,110.144 ; -48.291,113.954 -47.444,114.377 -46.597,113.954 -47.021,114.8 -46.597,115.647 -47.444,115.223 -48.291,115.647 -47.867,114.8 -48.291,113.954 ; -48.291,118.187 -47.867,118.187 -47.867,117.764 -47.021,117.764 -47.021,118.187 -46.597,118.187 -46.597,119.033 -47.021,119.033 -47.021,119.457 -47.867,119.457 -47.867,119.033 -48.291,119.033 -48.291,118.187 ; -48.291,123.267 -46.597,123.267 -47.444,121.574 -48.291,123.267 ; -48.291,125.807 -47.867,125.807 -47.444,125.384 -47.021,125.807 -46.597,125.807 -47.021,126.23 -46.597,126.653 -47.021,126.653 -47.444,127.077 -47.867,126.653 -48.291,126.653 -47.867,126.23 -48.291,125.807
  lines w0.381: -49.809,109.001 93.56,109.001 ; -49.809,128.051 93.56,128.051 ; -35.817,105.191 -35.817,131.861 ; -20.581,105.191 -20.581,131.861 ; 7.858,105.191 7.858,131.861 ; 20.708,105.191 20.708,131.861 ; 39.346,105.191 39.346,131.861 ; 54.328,105.191 54.328,131.861 ; -49.809,105.191 93.56,105.191 93.56,131.861 -49.809,131.861 -49.809,105.191
  text "Symbol" at -47.523,129.194 h1.83
  text "Count" at -34.674,129.194 h1.83
  text "Hole Size" at -19.438,129.194 h1.83
  text "Plated" at 9.001,129.194 h1.83
  text "Hole Type" at 21.851,129.194 h1.83
  text "Via/Pad" at 40.489,129.194 h1.83
  text "Drill Layer Pair" at 55.471,129.194 h1.83
  text "1" at -34.674,125.384 h1.52
  text "3.000mm (118.11mil)" at -19.438,125.384 h1.52
  text "NPTH" at 9.001,125.384 h1.52
  text "Round" at 21.851,125.384 h1.52
  text "Pad" at 40.489,125.384 h1.52
  text "Top Layer - Bottom Layer" at 55.471,125.384 h1.52
  text "4" at -34.674,121.574 h1.52
  text "1.650mm (64.96mil)" at -19.438,121.574 h1.52
  text "PTH" at 9.001,121.574 h1.52
  text "Round" at 21.851,121.574 h1.52
  text "Pad" at 40.489,121.574 h1.52
  text "Top Layer - Bottom Layer" at 55.471,121.574 h1.52
  text "6" at -34.674,117.764 h1.52
  text "1.200mm (47.24mil)" at -19.438,117.764 h1.52
  text "PTH" at 9.001,117.764 h1.52
  text "Round" at 21.851,117.764 h1.52
  text "Pad" at 40.489,117.764 h1.52
  text "Top Layer - Bottom Layer" at 55.471,117.764 h1.52
  text "60" at -34.674,113.954 h1.52
  text "1.100mm (43.31mil)" at -19.438,113.954 h1.52
  text "PTH" at 9.001,113.954 h1.52
  text "Round" at 21.851,113.954 h1.52
  text "Pad" at 40.489,113.954 h1.52
  text "Top Layer - Bottom Layer" at 55.471,113.954 h1.52
  text "321" at -34.674,110.144 h1.52
  text "0.300mm (11.81mil)" at -19.438,110.144 h1.52
  text "PTH" at 9.001,110.144 h1.52
  text "Round" at 21.851,110.144 h1.52
  text "Via" at 40.489,110.144 h1.52
  text "Top Layer - Bottom Layer" at 55.471,110.144 h1.52
  text "392 Total" at -34.674,106.334 h1.52
Bottom Component Outline:
  text "BOTTOM" at 4.832,-1.5 h0.8
Extra Info:
  text "Hole_Count=.Hole_Count" at 0.25,-4.125 h1.5
  text "Net_Count=.Net_Count" at 0.25,-7.125 h1.5
  text "Track_Count=.Track_Count" at 0.25,-10.125 h1.5
  text "Component Count=.Component_Count" at 0.25,-13 h1.5
  text "Pad_Count=.Pad_Count" at 0.25,-16.125 h1.5

## Dimensions
0,0 to 0,100 on PCB Dim
0,0 to 40,0 on PCB Dim

## Text inside footprints (layer, text, board x,y; h text height)
P100: Top Overlay "30" at 37.967,31.255 h1.02 r270; Top Overlay "1" at 32.422,68.569 h1.02 r270; Top Overlay "2" at 37.192,68.739 h1.02 r270
P101: Top Overlay "30" at 6.867,31.255 h1.02 r270; Top Overlay "1" at 1.322,68.569 h1.02 r270; Top Overlay "2" at 6.092,68.739 h1.02 r270
P102: Top Overlay "3" at 26.25,11.6 h1.2 r270; Top Overlay "1" at 28.55,11.283 h1.2 r270
U200: Bottom Component Outline "VoutP" at 16.199,28.44 h1; Bottom Component Outline "Trim" at 15.199,38.6 h1; Bottom Component Outline "VoutN" at 16.199,48.76 h1; Bottom Component Outline "EN" at 28.3,48.76 h1; Bottom Component Outline "VinN" at 28.3,41.14 h1; Bottom Component Outline "VinP" at 28.3,36.06 h1
Z200: Bottom Component Outline "4" at 36.6,99.6 h0.6 r180; Top Component Outline "1" at 39.5,99.6 h0.6 r180; Top Solder "T" at 39.6,99.6 h0.6 r180; Bottom Solder "B" at 36.6,99.6 h0.6 r180